# EAGLE board PowerLight1.0 (EAGLE 5.10)
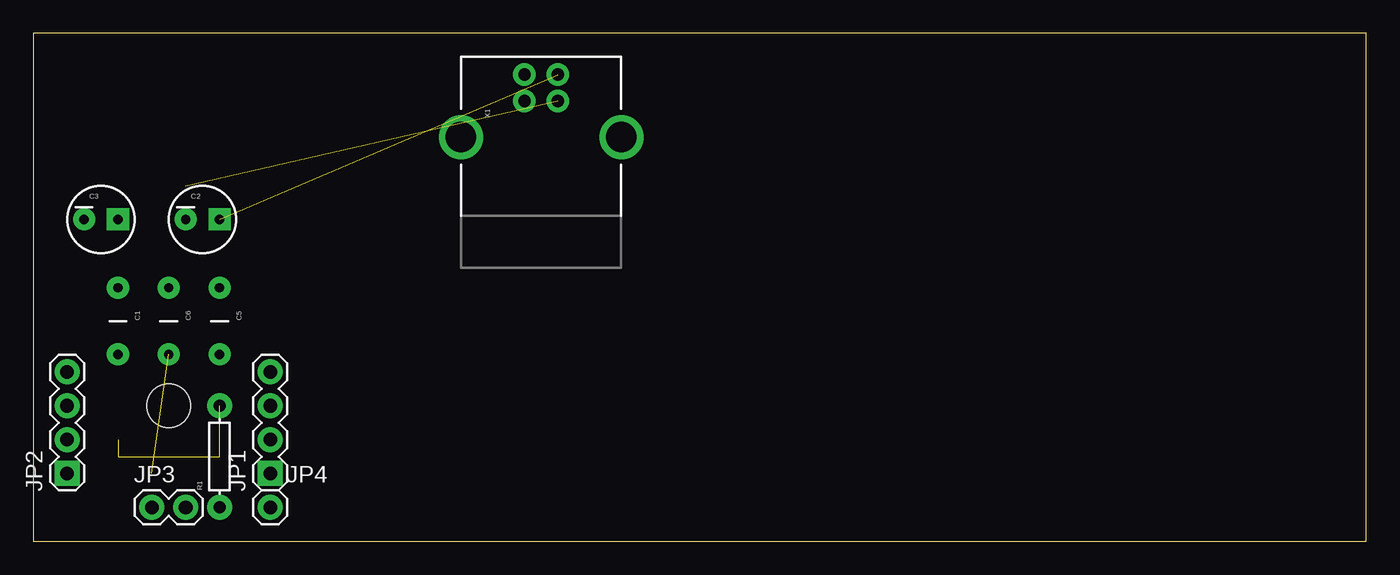
[diagram p0: board, top side]
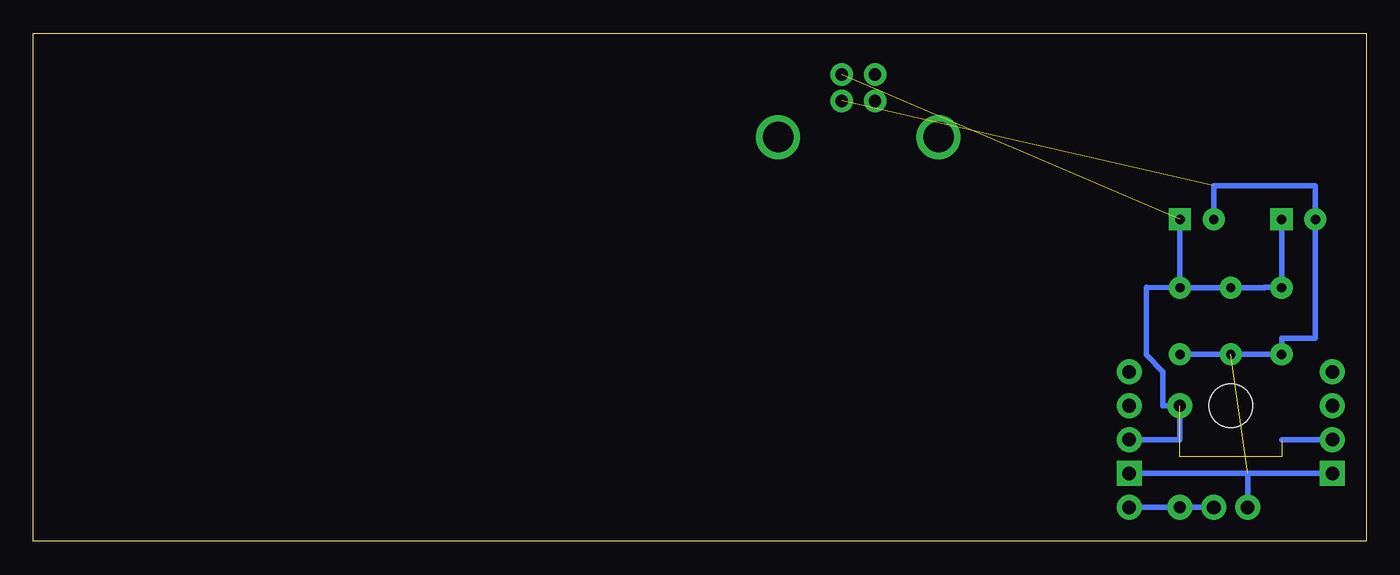
[diagram p1: board, bottom side, seen from below]

Size 100 x 38.09 mm. Coordinates in mm from the lower left corner, seen from the top.
Outline: 0,0 100,0 100,38.09 0,38.09 0,0
Copper layers (1*16): Top 0.035mm / dielectric 1.5mm / Bottom 0.035mm
Design rules "default": minimum track width 10mil, minimum drill 24mil, track to track 8mil, track to pad 8mil, pad to pad 8mil, via to via 8mil, smd to smd 8mil, copper to edge 40mil, drill to drill 8mil, minimum pad ring 10mil, minimum via ring 8mil, stop-mask expansion 4mil, vias tented up to drill 0mil, thermal gap 10mil

## Footprints (pad centres in the part's own frame; a part is rotated, then mirrored left to right if it is on the bottom)
CAP-PTH-5MM = drill 0.7 pad 1.651 round: 1 -2.5,0; 2 2.5,0
CPOL-RADIAL-10UF-25V = drill 0.7 pad 1.651 square: 1 1.27,0 | drill 0.7 pad 1.651 round: 2 -1.27,0
1X04 = drill 1.016 pad 1.88 square: 1 0,0 | drill 1.016 pad 1.88 round: 2 2.54,0; 3 5.08,0; 4 7.62,0
1X02 = drill 1.016 pad 1.88 round: 1 0,0; 2 2.54,0
1X01 = drill 1.016 pad 1.88 round: 1 0,0
AXIAL-0.3 = drill 0.9 pad 1.88 round: P$1 -3.81,0; P$2 3.81,0
STAND-OFF = hole 3.302: 0,0
USB-B-PTH = drill 0.914 pad 1.676 round: D+ 0,1.25; D- 1.981,1.25; GND 0,-1.25; VBUS 1.981,-1.25 | drill 2.286 round: P$1 -2.718,-6.02; P$2 -2.718,6.02

## Placement (x,y rotation side)
C1  [CAP-PTH-5MM]  6.35,16.51 270 top
C2  [CPOL-RADIAL-10UF-25V]  12.7,24.13 0 top
C3  [CPOL-RADIAL-10UF-25V]  5.08,24.13 0 top
C5  [CAP-PTH-5MM]  13.97,16.51 270 top
C6  [CAP-PTH-5MM]  10.16,16.51 270 top
JP1  [1X04]  17.78,5.08 90 top
JP2  [1X04]  2.54,5.08 90 top
JP3  [1X02]  8.89,2.54 0 top
JP4  [1X01]  17.78,2.54 0 top
R1  [AXIAL-0.3]  13.97,6.35 90 top
U$1  [STAND-OFF]  10.16,10.16 0 top
X1  USBPTH  [USB-B-PTH]  38.1,33.02 90 top

## Library data of the parts
C1-C3 C5 C6 JP1-JP4 R1 U$1 X1 = _SparkFun 12:09 

## Nets
GND: C1.2 C2.2 C3.2 C5.2 C6.2 JP1.1 JP2.1 JP3.1 X1.GND
N$1: JP3.2 JP4.1 R1.P$1
VCC: C1.1 C2.1 C3.1 C5.1 C6.1 JP1.2 JP2.2 R1.P$2 X1.VBUS

## Tracks (layer width: path | path; a pad name or v marks a point on that pad's centre or on a via)
GND  (2 unrouted)
  Bottom 0.406: C5.2 C6.2 C1.2 6.35,15.24 3.81,15.24 C3.2 3.81,26.67 11.43,26.67 C2.2 | JP2.1 8.89,5.08 | 8.89,5.08 JP3.1 | 8.89,5.08 JP1.1
N$1
  Bottom 0.406: JP3.2 R1.P$1 JP4.1
VCC  (4 unrouted)
  Bottom 0.406: C3.1 C1.1 6.35,19.05 7.62,19.05 7.62,19.01 C6.1 C5.1 | C5.1 C2.1 | JP1.2 13.97,7.62 R1.P$2 15.24,10.16 15.24,12.7 16.51,13.97 16.51,19.05 C5.1 | JP2.2 6.35,7.62